# Altium PCB STM_System_Board.PCBDOC (part 9 of 16)
Units mm, origin at the board's own origin, x right, y up, seen from the top; angles counter-clockwise.
Board outline 222.53 x 100.01 mm, 6 copper layers (Top Layer, Int1 (GND), Int2 (Sign), Layer 1, Layer 2, Bottom Layer), stack 1.526 mm thick; 702 components, 774 nets, 3596 pads, 1988 vias.
Unrouted connection lines stored in the file: 1.
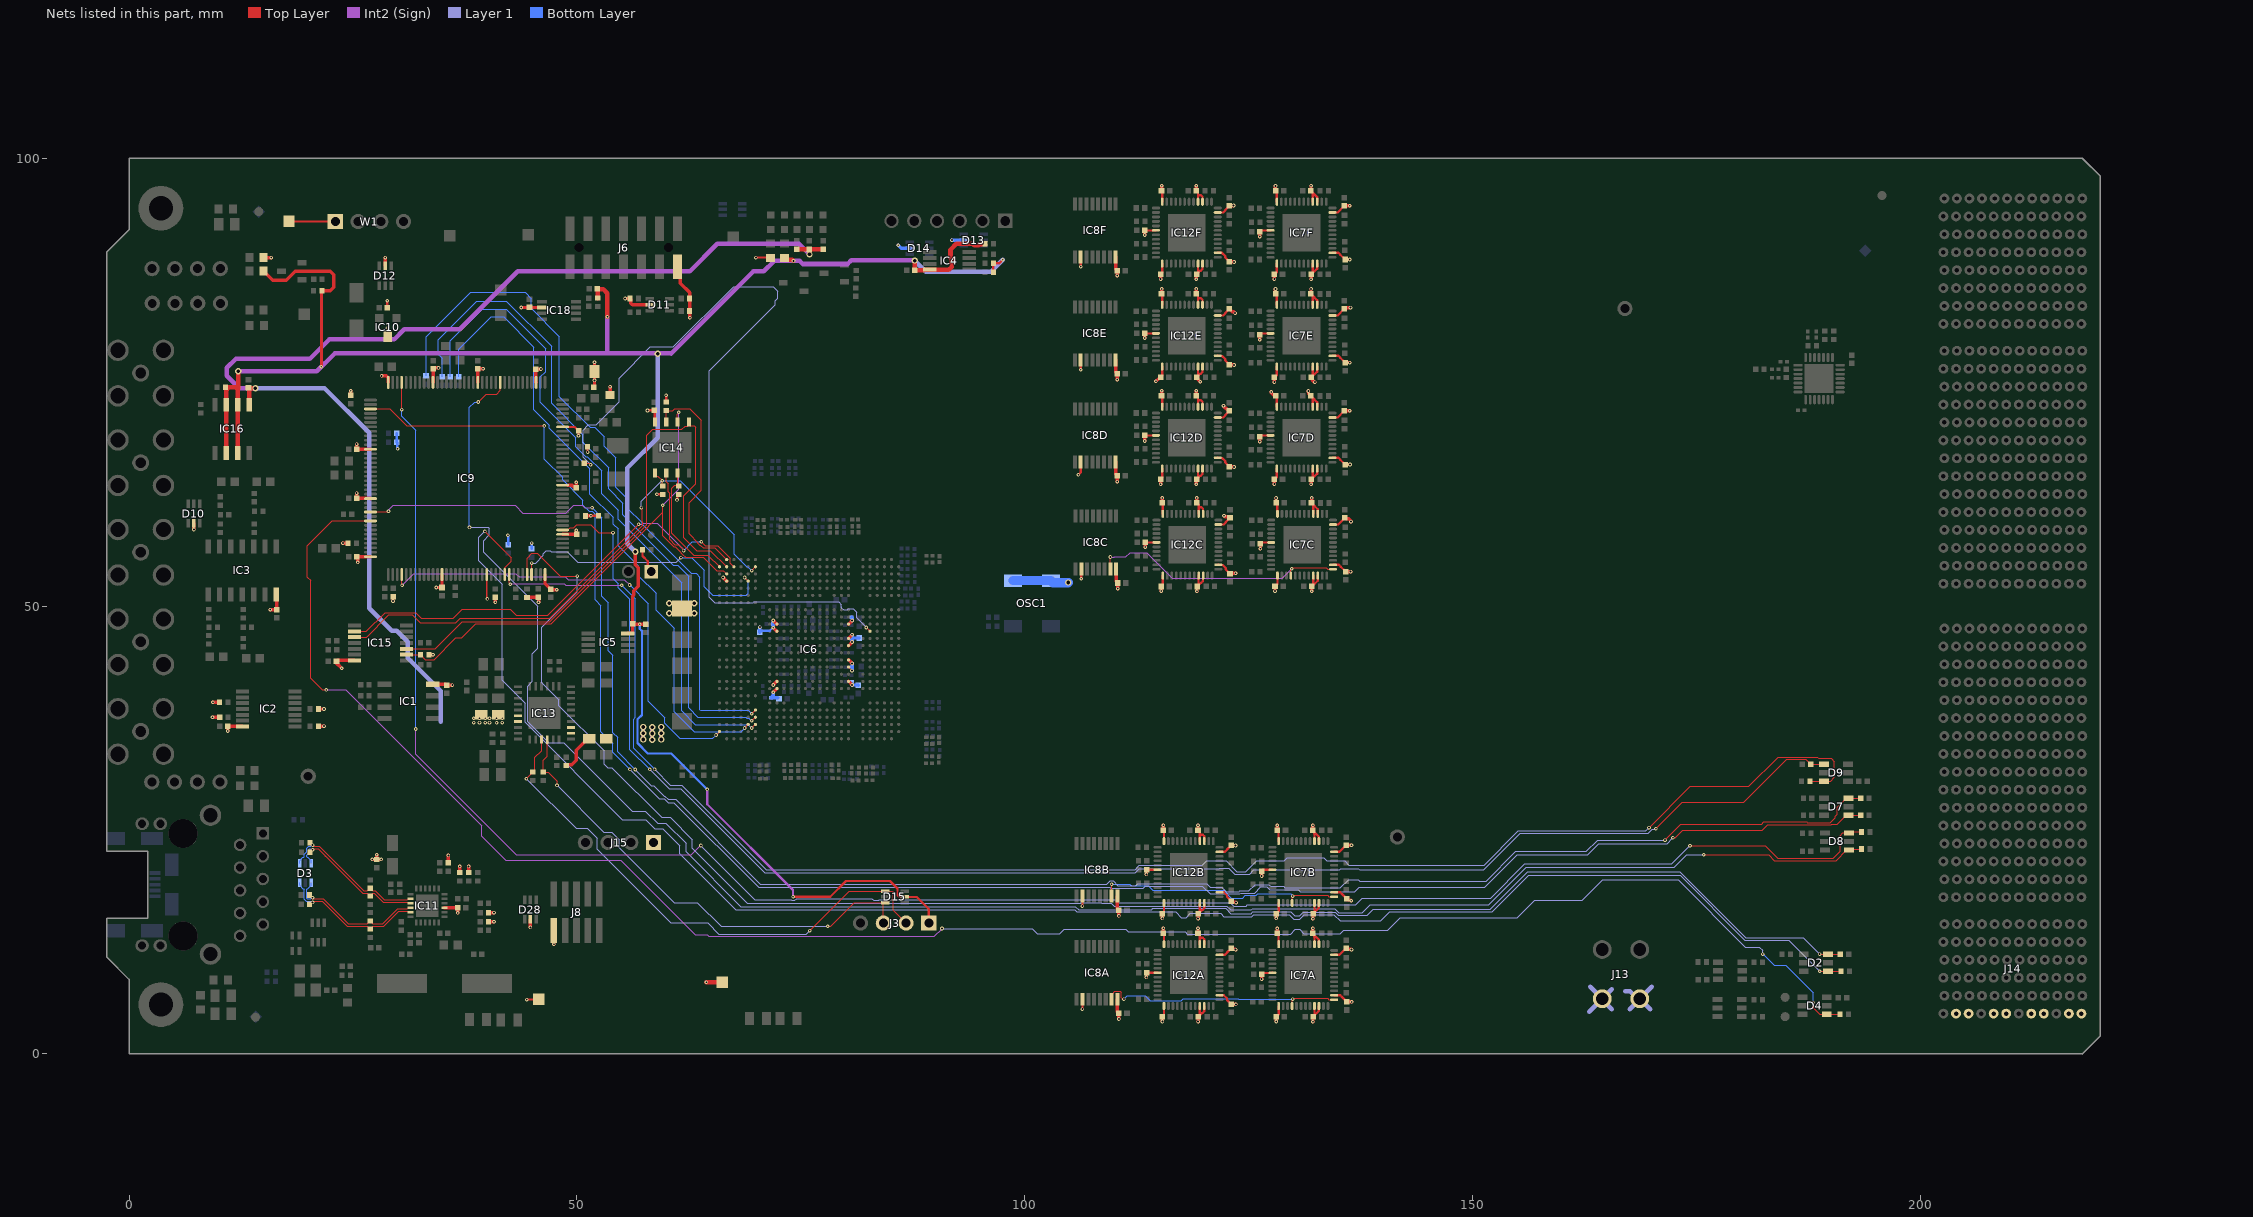
[diagram p12: the nets of this part, all layers, seen from the top]

## Via types
v1: diameter 0.4, hole 0.2, Top Layer to Bottom Layer, tented both sides, 1806 vias
v2: diameter 0.7, hole 0.4, Top Layer to Bottom Layer, tented both sides, 92 vias
v3: diameter 0.7, hole 0.4, Top Layer to Bottom Layer, 90 vias

## Nets (pads, with @x,y where several pads share a name; then routed paths per layer and width w, separated by ;. In a path a pad name is that pad's centre, name@x,y a point inside that pad or via, vN(x,y) a via of type N, cw(c..) or ccw(c..) an arc to the next point about the centre after c; other vN are vias at no path point) (continued)
P3V3: C1.2 C5.2 C6.2 C8A.2 C8B.2 C8C.2 C8D.2 C8E.2 C8F.2 C9A.2 C9B.2 C9C.2 C9D.2 C9E.2 C9F.2 C12A.2 C12B.2 C12C.2 C12D.2 C12E.2 C12F.2 C13A.2 C13B.2 C13C.2 C13D.2 C13E.2 C13F.2 C16A.2 C16B.2 C16C.2 C16D.2 C16E.2 C16F.2 C17A.2 C17B.2 C17C.2 C17D.2 C17E.2 C17F.2 C18A.2 C18B.2 C18C.2 C18D.2 C18E.2 C18F.2 C19A.2 C19B.2 C19C.2 C19D.2 C19E.2 C19F.2 C20A.2 C20B.2 C20C.2 C20D.2 C20E.2 C20F.2 C34.2 C35.1 C36.2 C37.1 C38.1 C41.1 C43.1 C44.2 C45.2 C47.2 C48.2 C49.2 C50.2 C51.2 C53.2 C55.2 C56.2 C57.1 C67.1 C70.1 C71.1 C72.1 C73.1 C74.1 C75.2 C78.2 C84.2 C86.2 C89.1 C135A.2 C135B.2 C135C.2 C135D.2 C135E.2 C135F.2 C136A.2 C136B.2 C136C.2 C136D.2 C136E.2 C136F.2 C137A.2 C137B.2 C137C.2 C137D.2 C137E.2 C137F.2 C138A.2 C138B.2 C138C.2 C138D.2 C138E.2 C138F.2 C139A.2 C139B.2 C139C.2 C139D.2 C139E.2 C139F.2 C140A.2 C140B.2 C140C.2 C140D.2 C140E.2 C140F.2 C143.2 D10.5 D11.5 D12.5 D13.5 D14.5 D28.5 IC1.8 IC2.14 IC3.14 IC6.AE4 IC6.H10 IC6.H12 IC6.H13 IC6.H15 IC6.H16 IC6.H18 IC6.V10 IC6.V11 IC6.V18 IC6.V19 IC7A.2 IC7A.11 IC7A.15 IC7A.16 IC7A.24 IC7A.30 IC7A.37 IC7A.45 IC7A.46 IC7B.2 IC7B.11 IC7B.15 IC7B.16 IC7B.24 IC7B.30 IC7B.37 IC7B.45 IC7B.46 IC7C.2 IC7C.11 IC7C.15 IC7C.16 IC7C.24 IC7C.30 IC7C.37 IC7C.45 IC7C.46 IC7D.2 IC7D.11 IC7D.15 IC7D.16 IC7D.24 IC7D.30 IC7D.37 IC7D.45 IC7D.46 IC7E.2 IC7E.11 IC7E.15 IC7E.16 IC7E.24 IC7E.30 IC7E.37 IC7E.45 IC7E.46 IC7F.2 IC7F.11 IC7F.15 IC7F.16 IC7F.24 IC7F.30 IC7F.37 IC7F.45 IC7F.46 IC8A.10 IC8A.16 IC8B.10 IC8B.16 IC8C.10 IC8C.16 IC8D.10 IC8D.16 IC8E.10 IC8E.16 IC8F.10 IC8F.16 IC9.6 IC9.17 IC9.30 IC9.39 IC9.52 IC9.62 IC9.72 IC9.84 IC9.95 IC9.108 IC9.121 IC9.131 IC9.144 IC10.3 IC11.9 IC12A.2 IC12A.11 IC12A.15 IC12A.16 IC12A.24 IC12A.30 IC12A.37 IC12A.45 IC12A.46 IC12B.2 IC12B.11 IC12B.15 IC12B.16 IC12B.24 IC12B.30 IC12B.37 IC12B.45 IC12B.46 IC12C.2 IC12C.11 IC12C.15 IC12C.16 IC12C.24 IC12C.30 IC12C.37 IC12C.45 IC12C.46 IC12D.2 IC12D.11 IC12D.15 IC12D.16 IC12D.24 IC12D.30 IC12D.37 IC12D.45 IC12D.46 IC12E.2 IC12E.11 IC12E.15 IC12E.16 IC12E.24 IC12E.30 IC12E.37 IC12E.45 IC12E.46 IC12F.2 IC12F.11 IC12F.15 IC12F.16 IC12F.24 IC12F.30 IC12F.37 IC12F.45 IC12F.46 IC13.8 IC13.9 IC14.8 IC15.14 IC18.2 J6.2 J8.1 J15.1 JP2.1 L7.2 L15.1 OSC1.1 OSC1.4 R1.1 R2.1 R11.1 R12.2 R13.1 R16.1 R18.1 R21.1 R31.1 R33.1 R35.2 R42.1 R43.1 R44.1 R59.1 R95.1 R97.2 R98.1 R99.1 R131.1 R132.1 R136.1 R196.1 R206.1 R223.2 R224.2 R225.2 R226.2 R229.2 R234.2 R239.1 R240.1 R241.2 R300.2 TP3.1 TP5.1 W1.1 | length 354.6
  Top Layer w0.127: IC6.H16@80.316,43.184 v1@80.702,42.798
  Top Layer w0.203: IC9.131@39.935,53.521 39.935,50.87 v1(40.005,50.8)
  Top Layer w0.254: TP5.1@17.856,92.939 17.878,92.917 W1.1@23.028,92.917 ; v1(28.829,81.026) 28.829,80.159 IC10.3@28.877,80.111 ; v1(28.829,84.074) 28.836,84.067 28.836,83.297 C67.1@28.842,83.291 ; v1(44.399,6.071) 45.695,6.071 TP3.1@45.72,6.096 ; IC9.30@48.41,69.996 49.754,69.996 50.21,69.54 50.175,69.505 v1(50.175,69) ; R13.1@51.16,67.766 51.171,67.756 51.171,67.193 v1(51.181,67.183) ; v1(51.562,60.071) R2.1@52.413,60.071 ; R229.2@57.315,56.276 57.315,55.588 57.912,54.991 57.912,54.229 JP2.1@58.293,53.848 ; v1(57.875,71.825) 57.9,71.85 C45.2@58.65,71.85 58.674,71.826 58.674,70.568 IC14.8@58.697,70.544 ; v1(58.928,62.484) 58.943,62.469 59.571,62.469 R223.2@59.586,62.454 ; v1(59.944,73.533) 59.956,73.521 59.956,72.773 R224.2@59.967,72.762 ; v1(61.167,61.849) 61.214,61.896 61.214,62.304 R225.2@61.364,62.454 ; v1(69.977,88.9) 71.59,88.9 R196.1@71.628,88.862 ; v1(105.975,64.65) 106.229,64.904 IC8D.10@106.229,66.094 ; v1(106.229,76.385) IC8E.10@106.229,77.479 ; v1(106.229,87.893) IC8F.10@106.229,88.979 ; v1(106.294,53.052) IC8C.10@106.294,54.146 ; v1(106.425,5.012) IC8A.10@106.425,6.106 ; v1(106.425,16.501) IC8B.10@106.425,17.606 ; C17D.2@113.394,69.044 IC12D.30@114.629,69.044 ; C17E.2@113.394,80.429 IC12E.30@114.629,80.429 ; C17F.2@113.394,91.929 IC12F.30@114.629,91.929 ; C17C.2@113.459,57.096 IC12C.30@114.694,57.096 ; C17A.2@113.59,9.056 IC12A.30@114.825,9.056 ; C17B.2@113.59,20.556 IC12B.30@114.825,20.556 ; C135D.2@115.154,64.129 115.32,64.295 115.32,65.336 IC12D.37@115.329,65.344 ; C135E.2@115.154,75.513 115.32,75.68 115.32,76.721 IC12E.37@115.329,76.729 ; C135F.2@115.154,87.013 115.32,87.18 115.32,88.221 IC12F.37@115.329,88.229 ; C135C.2@115.219,52.18 115.385,52.347 115.385,53.388 IC12C.37@115.394,53.396 ; C20D.2@115.256,73.477 115.32,73.413 115.32,72.253 IC12D.24@115.329,72.244 ; C20E.2@115.256,84.862 115.32,84.798 115.32,83.638 IC12E.24@115.329,83.629 ; C20F.2@115.256,96.362 115.32,96.298 115.32,95.138 IC12F.24@115.329,95.129 ; C20C.2@115.321,61.529 115.385,61.465 115.385,60.305 IC12C.24@115.394,60.296 ; C135A.2@115.35,4.141 115.516,4.307 115.516,5.348 IC12A.37@115.525,5.356 ; C135B.2@115.35,15.641 115.516,15.807 115.516,16.848 IC12B.37@115.525,16.856 ; C20A.2@115.452,13.489 115.516,13.425 115.516,12.265 IC12A.24@115.525,12.256 ; C20B.2@115.452,24.989 115.516,24.925 115.516,23.765 IC12B.24@115.525,23.756 ; C19D.2@119.131,73.471 119.329,73.273 119.329,73.061 ; C19E.2@119.131,84.856 119.329,84.658 119.329,84.446 ; C19F.2@119.131,96.356 119.329,96.158 119.329,95.946 ; C18D.2@119.163,64.129 C18D.2@119.32,64.286 ; C18E.2@119.163,75.513 C18E.2@119.32,75.671 ; C18F.2@119.163,87.013 C18F.2@119.32,87.171 ; C19C.2@119.196,61.523 119.394,61.325 119.394,61.113 ; C18C.2@119.228,52.18 C18C.2@119.385,52.338 ; C19A.2@119.327,13.483 119.525,13.285 119.525,13.073 ; C19B.2@119.327,24.983 119.525,24.785 119.525,24.573 ; IC12D.45@119.329,65.344 119.32,65.336 C18D.2@119.32,64.286 ; IC12D.16@119.329,72.244 119.329,73.061 ; IC12E.45@119.329,76.729 119.32,76.721 C18E.2@119.32,75.671 ; IC12E.16@119.329,83.629 119.329,84.446 ; IC12F.45@119.329,88.229 119.32,88.221 C18F.2@119.32,87.171 ; IC12F.16@119.329,95.129 119.329,95.946 ; C18A.2@119.359,4.141 C18A.2@119.516,4.298 ; C18B.2@119.359,15.641 C18B.2@119.516,15.798 ; IC12C.45@119.394,53.396 119.385,53.388 C18C.2@119.385,52.338 ; IC12C.16@119.394,60.296 119.394,61.113 ; IC12A.45@119.525,5.356 119.516,5.348 C18A.2@119.516,4.298 ; IC12A.16@119.525,12.256 119.525,13.073 ; IC12B.45@119.525,16.856 119.516,16.848 C18B.2@119.516,15.798 ; IC12B.16@119.525,23.756 119.525,24.573 ; IC12D.46@119.829,65.344 119.82,65.336 119.82,64.744 119.625,64.549 119.583,64.549 C18D.2@119.32,64.286 ; IC12D.15@119.829,72.244 119.82,72.253 119.82,72.802 119.653,72.969 119.421,72.969 119.329,73.061 ; IC12E.46@119.829,76.729 119.82,76.721 119.82,76.129 119.625,75.934 119.583,75.934 C18E.2@119.32,75.671 ; IC12E.15@119.829,83.629 119.82,83.638 119.82,84.187 119.653,84.354 119.421,84.354 119.329,84.446 ; IC12F.46@119.829,88.229 119.82,88.221 119.82,87.629 119.625,87.434 119.583,87.434 C18F.2@119.32,87.171 ; IC12F.15@119.829,95.129 119.82,95.138 119.82,95.687 119.653,95.854 119.421,95.854 119.329,95.946 ; IC12C.46@119.894,53.396 119.885,53.388 119.885,52.796 119.69,52.601 119.648,52.601 C18C.2@119.385,52.338 ; IC12C.15@119.894,60.296 119.885,60.305 119.885,60.854 119.718,61.021 119.486,61.021 119.394,61.113 ; IC12A.46@120.025,5.356 120.016,5.348 120.016,4.756 119.821,4.561 119.779,4.561 C18A.2@119.516,4.298 ; IC12A.15@120.025,12.256 120.016,12.265 120.016,12.814 119.849,12.981 119.617,12.981 119.525,13.073 ; IC12B.46@120.025,16.856 120.016,16.848 120.016,16.256 119.821,16.061 119.779,16.061 C18B.2@119.516,15.798 ; IC12B.15@120.025,23.756 120.016,23.765 120.016,24.314 119.849,24.481 119.617,24.481 119.525,24.573 ; IC12D.2@121.529,66.544 121.538,66.536 122.013,66.536 122.354,66.194 122.354,66.022 C136D.2@122.832,65.544 ; IC12D.11@121.529,71.044 121.538,71.053 122.134,71.053 122.354,71.273 122.354,71.316 C137D.2@122.832,71.794 ; IC12E.2@121.529,77.929 121.538,77.921 122.013,77.921 122.354,77.579 122.354,77.407 C136E.2@122.832,76.929 ; IC12E.11@121.529,82.429 121.538,82.438 122.134,82.438 122.354,82.658 122.354,82.701 C137E.2@122.832,83.179 ; IC12F.2@121.529,89.429 121.538,89.421 122.013,89.421 122.354,89.079 122.354,88.907 C136F.2@122.832,88.429 ; IC12F.11@121.529,93.929 121.538,93.938 122.134,93.938 122.354,94.158 122.354,94.201 C137F.2@122.832,94.679 ; IC12C.2@121.594,54.596 121.603,54.588 122.078,54.588 122.419,54.246 122.419,54.074 C136C.2@122.897,53.596 ; IC12C.11@121.594,59.096 121.603,59.105 122.199,59.105 122.419,59.325 122.419,59.368 C137C.2@122.897,59.846 ; IC12A.2@121.725,6.556 121.734,6.548 122.209,6.548 122.55,6.206 122.55,6.034 C136A.2@123.028,5.556 ; IC12A.11@121.725,11.056 121.734,11.065 122.33,11.065 122.55,11.285 122.55,11.328 C137A.2@123.028,11.806 ; IC12B.2@121.725,18.056 121.734,18.048 122.209,18.048 122.55,17.706 122.55,17.534 C136B.2@123.028,17.056 ; IC12B.11@121.725,22.556 121.734,22.565 122.33,22.565 122.55,22.785 122.55,22.828 C137B.2@123.028,23.306 ; C16D.2@126.229,68.894 126.37,69.036 127.42,69.036 IC7D.30@127.429,69.044 ; C16E.2@126.229,80.279 126.37,80.421 127.42,80.421 IC7E.30@127.429,80.429 ; C16F.2@126.229,91.779 126.37,91.921 127.42,91.921 IC7F.30@127.429,91.929 ; C16C.2@126.294,56.946 126.435,57.088 127.485,57.088 IC7C.30@127.494,57.096 ; C16A.2@126.425,8.906 126.566,9.048 127.616,9.048 IC7A.30@127.625,9.056 ; C16B.2@126.425,20.406 126.566,20.548 127.616,20.548 IC7B.30@127.625,20.556 ; C140D.2@127.854,64.134 128.129,64.409 IC7D.37@128.129,65.344 ; C140E.2@127.854,75.519 128.129,75.794 IC7E.37@128.129,76.729 ; C140F.2@127.854,87.019 128.129,87.294 IC7F.37@128.129,88.229 ; C140C.2@127.919,52.186 128.194,52.461 IC7C.37@128.194,53.396 ; C9D.2@127.994,73.469 128.12,73.343 128.12,72.253 IC7D.24@128.129,72.244 ; C9E.2@127.994,84.854 128.12,84.728 128.12,83.638 IC7E.24@128.129,83.629 ; C9F.2@127.994,96.354 128.12,96.228 128.12,95.138 IC7F.24@128.129,95.129 ; C140A.2@128.05,4.146 128.325,4.421 IC7A.37@128.325,5.356 ; C140B.2@128.05,15.646 128.325,15.921 IC7B.37@128.325,16.856 ; C9C.2@128.059,61.521 128.185,61.395 128.185,60.305 IC7C.24@128.194,60.296 ; C9A.2@128.19,13.481 128.316,13.355 128.316,12.265 IC7A.24@128.325,12.256 ; C9B.2@128.19,24.981 128.316,24.855 128.316,23.765 IC7B.24@128.325,23.756 ; C12D.2@131.94,73.466 C12D.2@131.927,73.453 C12D.2@132.11,73.27 ; C12E.2@131.94,84.851 C12E.2@131.927,84.838 C12E.2@132.11,84.655 ; v1@131.94,85.392 v1(131.952,85.404) ; C12F.2@131.94,96.351 C12F.2@131.927,96.338 C12F.2@132.11,96.155 ; v1@131.94,96.892 v1(131.952,96.904) ; C13D.2@131.964,64.131 132.12,64.287 132.12,65.336 IC7D.45@132.129,65.344 ; C13F.2@131.964,87.016 132.12,87.172 132.12,88.221 IC7F.45@132.129,88.229 ; C13D.2@131.977,64.134 132.618,64.775 132.62,64.775 132.62,65.336 IC7D.46@132.629,65.344 ; C13E.2@131.977,75.519 132.618,76.16 132.62,76.16 132.62,76.721 IC7E.46@132.629,76.729 ; C13F.2@131.977,87.019 132.618,87.66 132.62,87.66 132.62,88.221 IC7F.46@132.629,88.229 ; C12C.2@132.004,61.517 C12C.2@131.992,61.505 C12C.2@132.175,61.322 ; v1@132.004,62.059 v1(132.017,62.071) ; C13C.2@132.029,52.183 132.185,52.339 132.185,53.388 IC7C.45@132.194,53.396 ; C13C.2@132.042,52.186 132.683,52.827 132.685,52.827 132.685,53.388 IC7C.46@132.694,53.396 ; C13E.2@132.12,75.672 132.12,76.721 IC7E.45@132.129,76.729 ; IC7D.16@132.129,72.244 132.129,72.969 132.166,73.006 132.11,73.061 C12D.2@132.11,73.27 ; IC7E.16@132.129,83.629 132.129,84.354 132.166,84.391 132.11,84.446 C12E.2@132.11,84.655 ; IC7F.16@132.129,95.129 132.129,95.854 132.166,95.891 132.11,95.946 C12F.2@132.11,96.155 ; C12A.2@132.136,13.478 C12A.2@132.123,13.465 C12A.2@132.306,13.282 ; v1@132.136,14.019 v1(132.148,14.031) ; C12B.2@132.136,24.978 C12B.2@132.123,24.965 C12B.2@132.306,24.782 ; v1@132.136,25.519 v1(132.148,25.531) ; C13A.2@132.16,4.143 132.316,4.299 132.316,5.348 IC7A.45@132.325,5.356 ; C13B.2@132.16,15.643 132.316,15.799 132.316,16.848 IC7B.45@132.325,16.856 ; C13A.2@132.173,4.146 132.814,4.787 132.816,4.787 132.816,5.348 IC7A.46@132.825,5.356 ; C13B.2@132.173,15.646 132.814,16.287 132.816,16.287 132.816,16.848 IC7B.46@132.825,16.856 ; IC7C.16@132.194,60.296 132.194,61.021 132.231,61.058 132.175,61.113 C12C.2@132.175,61.322 ; IC7A.16@132.325,12.256 132.325,12.981 132.362,13.018 132.306,13.073 C12A.2@132.306,13.282 ; IC7B.16@132.325,23.756 132.325,24.481 132.362,24.518 132.306,24.573 C12B.2@132.306,24.782 ; IC7D.15@132.629,72.244 132.62,72.253 132.62,72.76 C12D.2@132.11,73.27 ; IC7E.15@132.629,83.629 132.62,83.638 132.62,84.145 C12E.2@132.11,84.655 ; IC7F.15@132.629,95.129 132.62,95.138 132.62,95.645 C12F.2@132.11,96.155 ; IC7C.15@132.694,60.296 132.685,60.305 132.685,60.812 C12C.2@132.175,61.322 ; IC7A.15@132.825,12.256 132.816,12.265 132.816,12.772 C12A.2@132.306,13.282 ; IC7B.15@132.825,23.756 132.816,23.765 132.816,24.272 C12B.2@132.306,24.782 ; IC7D.2@134.329,66.544 135.006,66.544 135.207,66.344 135.207,66.337 C139D.2@135.749,65.794 ; IC7D.11@134.329,71.044 134.338,71.053 134.92,71.053 C138D.2@135.661,71.794 C138D.2@135.725,71.794 ; IC7E.2@134.329,77.929 135.006,77.929 135.207,77.729 135.207,77.722 C139E.2@135.749,77.179 ; IC7E.11@134.329,82.429 134.338,82.438 134.92,82.438 C138E.2@135.661,83.179 C138E.2@135.725,83.179 ; IC7F.2@134.329,89.429 135.006,89.429 135.207,89.229 135.207,89.222 C139F.2@135.749,88.679 ; IC7F.11@134.329,93.929 134.338,93.938 134.92,93.938 C138F.2@135.661,94.679 C138F.2@135.725,94.679 ; IC7C.2@134.394,54.596 135.071,54.596 135.272,54.396 135.272,54.389 C139C.2@135.814,53.846 ; IC7C.11@134.394,59.096 134.403,59.105 134.985,59.105 C138C.2@135.726,59.846 C138C.2@135.79,59.846 ; IC7A.2@134.525,6.556 135.202,6.556 135.403,6.356 135.403,6.349 C139A.2@135.945,5.806 ; IC7A.11@134.525,11.056 134.534,11.065 135.116,11.065 C138A.2@135.857,11.806 C138A.2@135.921,11.806 ; IC7B.2@134.525,18.056 135.202,18.056 135.403,17.856 135.403,17.849 C139B.2@135.945,17.306 ; IC7B.11@134.525,22.556 134.534,22.565 135.116,22.565 C138B.2@135.857,23.306 C138B.2@135.921,23.306
  Top Layer w0.381: v1(7.239,58.54) D10.5@7.239,59.225 ; v1(9.316,37.577) R59.1@10.116,37.577 ; v1(9.36,39.266) v1(9.36,39.266) 10.103,39.267 R21.1@10.104,39.268 ; v1(11.024,36.053) C5.2@11.024,36.601 11.047,36.578 12.617,36.578 IC2.14@12.639,36.556 ; R206.1@15.024,88.9 v1(15.875,88.9) ; v1(15.767,49.599) C6.2@16.51,49.599 16.481,49.628 16.481,51.237 IC3.14@16.451,51.266 ; R11.1@21.139,36.601 v1(21.762,36.601) ; R18.1@21.139,38.506 v1(21.762,38.506) ; v1(23.749,43.053) 23.159,43.643 C44.2@23.159,43.844 23.241,43.926 IC15.14@25.166,43.926 ; v1(23.876,57.023) 23.88,57.019 24.431,57.019 R16.1@24.454,56.996 ; v1(24.74,74.041) 24.743,74.037 24.743,73.542 R300.2@24.765,73.52 ; v1(25.4,62.611) 25.404,62.607 25.404,62.049 C74.1@25.409,62.043 25.433,62.02 26.937,62.02 IC9.95@26.96,61.996 ; v1(25.4,68.072) 25.404,68.068 25.404,67.502 C73.1@25.409,67.496 IC9.84@26.96,67.496 ; v1(25.527,54.864) 25.523,54.868 25.523,55.382 C57.1@25.409,55.496 IC9.108@26.96,55.496 ; v1(27.149,21.71) L7.2@27.66,21.71 ; v1(27.66,22.225) L7.2@27.66,21.71 ; v1(28.157,21.71) L7.2@27.66,21.71 ; v1(28.194,75.692) 28.709,75.692 28.935,75.465 IC9.72@28.935,74.971 ; D12.5@28.6,87.975 v1(28.6,88.9) ; v1(29.464,50.546) 29.468,50.55 29.468,51.024 R33.1@29.479,51.035 ; R226.2@33.489,44.554 v1(33.932,44.554) ; IC1.8@33.9,41.255 35.37,41.255 C1.2@35.45,41.175 v1(36.1,41.175) ; IC9.62@33.935,74.971 C35.1@33.935,76.495 34.018,76.577 34.54,76.577 v1(34.544,76.581) ; v1(34.29,52.07) C70.1@34.933,52.069 ; C70.1@34.933,52.069 34.934,52.07 IC9.121@34.935,53.521 IC9.121@34.935,53.521 ; IC11.9@35.203,16.311 C84.2@36.699,16.311 v1(36.7,15.75) ; R99.1@35.647,21.335 v1(35.647,22.158) ; R98.1@36.909,20.244 v1(36.909,20.937) ; R44.1@37.909,20.244 v1(37.909,20.937) ; IC9.52@38.935,74.971 C37.1@38.935,76.495 39.5,76.495 39.52,76.475 v1(39.525,76.475) ; R43.1@40.139,14.754 v1(40.737,14.754) ; R42.1@40.139,15.781 v1(40.737,15.781) ; R31.1@40.881,50.972 40.89,50.963 40.89,50.423 v1(40.894,50.419) ; v1(43.775,83.325) IC18.2@46.1,83.325 ; R35.2@44.424,50.949 44.439,50.964 45.666,50.964 R97.2@45.681,50.979 45.716,50.944 45.716,50.43 45.711,50.424 v1(45.711,50.419) ; v1(44.8,14.128) D28.5@44.8,15.01 ; IC9.39@45.435,74.971 45.42,74.986 45.42,76.429 C71.1@45.405,76.445 45.411,76.45 45.97,76.45 v1(45.974,76.454) ; IC9.144@46.435,53.521 46.435,52.478 C72.1@47.05,51.864 47.094,51.82 47.748,51.82 v1(47.752,51.816) ; v1(47.425,12.246) J8.1@47.425,13.854 ; IC9.6@48.41,57.996 C43.1@49.985,57.996 49.92,58.062 49.92,58.447 v1(49.916,58.45) ; R234.2@48.808,32.187 48.907,32.286 49.431,32.286 49.911,32.766 49.911,33.899 51.193,35.181 C34.2@51.368,35.181 ; IC9.17@48.945,63.464 49.491,63.464 49.56,63.394 49.582,63.394 49.657,63.319 49.806,63.319 C38.1@49.925,63.2 ; C38.1@49.925,63.405 v1(49.925,63.825) ; R1.1@50.954,60.05 50.971,60.067 v1@51.562,60.067 ; L15.1@51.885,74.425 51.954,74.494 C78.2@51.954,76.2 ; v1(51.962,75.184) 51.958,75.188 51.958,76.196 C78.2@51.954,76.2 ; v1(51.962,77.216) 51.958,77.212 51.958,76.204 C78.2@51.954,76.2 ; R95.1@53.7,73.575 v1(53.7,74.475) ; v1(55.372,84.328) R241.2@55.918,84.328 56.007,84.239 56.007,83.82 56.195,83.632 D11.5@58.129,83.632 ; J6.2@61.213,87.882 61.523,87.573 61.523,86.051 62.573,85.001 R240.1@62.573,84.328 R239.1@62.573,82.931 62.573,82.212 62.611,82.174 v1(62.611,82.169) ; v1(66.315,53.184) IC6.AE4@66.715,52.784 ; v1(71.915,40.384) IC6.V19@72.315,40.784 ; v1(71.915,41.184) IC6.V18@72.315,41.584 ; v1(71.915,47.584) IC6.V11@72.315,47.184 ; v1(71.915,48.384) IC6.V10@72.315,47.984 ; IC6.H18@80.315,41.584 v1(80.715,41.184) ; IC6.H15@80.315,43.984 v1(80.715,43.584) ; IC6.H13@80.315,45.584 v1(80.715,45.984) ; IC6.H12@80.315,46.384 v1(80.715,46.784) ; IC6.H10@80.315,47.984 v1(80.715,48.384) ; IC8D.16@110.129,66.094 110.129,64.694 C8D.2@110.304,64.519 v1(110.304,63.892) ; IC8E.16@110.129,77.479 110.129,76.079 C8E.2@110.304,75.904 v1(110.304,75.277) ; IC8F.16@110.129,88.979 110.129,87.579 C8F.2@110.304,87.404 v1(110.304,86.89) ; IC8C.16@110.194,54.146 110.194,52.746 C8C.2@110.369,52.571 v1(110.369,51.944) ; IC8A.16@110.325,6.106 110.325,4.706 C8A.2@110.5,4.531 v1(110.5,3.904) ; IC8B.16@110.325,17.606 110.325,16.206 C8B.2@110.5,16.031 v1(110.5,15.404) ; v1(113.369,68.425) 113.373,68.428 113.373,69.066 C17D.2@113.381,69.074 ; v1(113.369,79.917) 113.381,79.929 C17E.2@113.381,80.459 ; v1(113.369,91.417) 113.381,91.429 C17F.2@113.381,91.959 ; v1(113.434,56.584) 113.446,56.596 C17C.2@113.446,57.126 ; v1(113.565,8.544) 113.577,8.556 C17A.2@113.577,9.086 ; v1(113.565,20.044) 113.577,20.056 C17B.2@113.577,20.586 ; v1(114.625,75.1) 114.919,75.394 115.034,75.394 C135E.2@115.154,75.513 ; v1(115.154,63.601) C135D.2@115.154,64.129 ; v1(115.154,86.498) C135F.2@115.154,87.013 ; v1(115.219,51.665) C135C.2@115.219,52.18 ; C20D.2@115.256,73.477 115.256,74.007 v1(115.269,74.019) ; C20E.2@115.256,84.862 115.256,85.392 v1(115.269,85.404) ; C20F.2@115.256,96.362 115.256,96.892 v1(115.269,96.904) ; C20C.2@115.321,61.529 115.321,62.059 v1(115.334,62.071) ; v1(115.35,3.625) C135A.2@115.35,4.141 ; v1(115.35,15.125) C135B.2@115.35,15.641 ; C20A.2@115.452,13.489 115.452,14.019 v1(115.465,14.031) ; C20B.2@115.452,24.989 115.452,25.519 v1(115.465,25.531) ; C19D.2@119.131,73.477 v1(119.131,74.019) ; C19E.2@119.131,84.862 v1(119.131,85.404) ; C19F.2@119.131,96.362 v1(119.131,96.904) ; v1(119.138,63.601) 119.15,63.613 C18D.2@119.15,64.143 ; v1(119.138,86.486) 119.15,86.498 C18F.2@119.15,87.028 ; C18E.2@119.15,75.528 119.282,75.396 119.282,75.318 v1(119.575,75.025) ; C19C.2@119.196,61.529 v1(119.196,62.071) ; v1(119.203,51.653) 119.215,51.665 C18C.2@119.215,52.195 ; C19A.2@119.327,13.489 v1(119.327,14.031) ; C19B.2@119.327,24.989 v1(119.327,25.518) ; v1(119.334,3.613) 119.346,3.625 C18A.2@119.346,4.155 ; v1(119.334,15.113) 119.346,15.125 C18B.2@119.346,15.655 ; v1(122.175,72.35) 122.175,72.345 122.204,72.315 122.204,72.253 122.39,72.067 122.458,72.067 122.611,71.914 122.712,71.914 C137D.2@122.832,71.794 ; v1(122.225,60.075) 122.23,60.075 122.341,59.965 122.779,59.965 C137C.2@122.897,59.846 ; C136D.2@122.811,65.532 123.341,65.532 v1(123.354,65.519) ; C136E.2@122.811,76.917 123.341,76.917 v1(123.354,76.904) ; C136F.2@122.811,88.417 123.341,88.417 v1(123.354,88.404) ; C137E.2@122.832,83.179 123.153,82.858 123.308,82.858 123.464,82.702 v1(123.469,82.702) ; C137F.2@122.832,94.679 122.845,94.693 123.289,94.693 v1(123.302,94.706) ; C136C.2@122.876,53.584 122.939,53.646 123.521,53.646 v1(123.525,53.65) ; C136A.2@123.007,5.544 123.537,5.544 v1(123.55,5.531) ; C136B.2@123.007,17.044 123.114,16.937 123.529,16.937 123.566,16.9 v1(123.571,16.9) ; C137A.2@123.028,11.806 123.147,11.687 123.479,11.687 123.52,11.646 v1(123.525,11.646) ; C137B.2@123.028,23.306 123.061,23.273 123.521,23.273 v1(123.525,23.27) ; v1(126.226,68.349) 126.239,68.362 C16D.2@126.239,68.892 ; v1(126.226,79.734) 126.239,79.747 C16E.2@126.239,80.277 ; v1(126.228,91.237) 126.229,91.767 C16F.2@126.239,91.777 ; v1(126.291,56.401) 126.304,56.414 C16C.2@126.304,56.944 ; v1(126.423,8.361) 126.435,8.374 C16A.2@126.435,8.904 ; v1(126.423,19.861) 126.435,19.874 C16B.2@126.435,20.404 ; v1(127.506,73.899) 127.51,73.896 127.51,73.817 127.739,73.588 127.874,73.588 C9D.2@127.994,73.469 ; v1(127.854,63.613) C140D.2@127.854,64.134 ; v1(127.854,74.998) C140E.2@127.854,75.519 ; v1(127.854,86.498) C140F.2@127.854,87.019 ; v1(127.919,51.665) C140C.2@127.919,52.186 ; C9E.2@127.966,84.849 127.966,85.379 v1(127.979,85.392) ; C9F.2@127.966,96.349 127.966,96.879 v1(127.979,96.892) ; C9C.2@128.031,61.516 128.031,62.046 v1(128.044,62.059) ; v1(128.05,3.625) C140A.2@128.05,4.146 ; v1(128.05,15.125) C140B.2@128.05,15.646 ; C9A.2@128.162,13.476 128.162,14.006 v1(128.175,14.019) ; C9B.2@128.163,24.976 128.179,24.993 128.179,25.514 v1(128.175,25.518) ; v1(131.65,74) 131.654,73.996 131.654,73.896 131.655,73.895 131.655,73.75 131.808,73.597 131.808,73.573 131.915,73.466 C12D.2@131.94,73.466 ; C12E.2@131.94,84.851 v1@131.94,85.392 ; C12F.2@131.94,96.351 v1@131.94,96.892 ; v1(131.952,63.588) 131.964,63.601 C13D.2@131.964,64.131 ; v1(131.952,86.473) 131.964,86.486 C13F.2@131.964,87.016 ; C13E.2@131.964,75.516 131.98,75.516 132.096,75.399 132.096,75.233 132.325,75.004 132.371,75.004 v1(132.375,75) ; C12C.2@132.004,61.517 v1@132.004,62.059 ; v1(132.017,51.64) 132.029,51.653 C13C.2@132.029,52.183 ; C12A.2@132.136,13.478 v1@132.136,14.019 ; C12B.2@132.136,24.978 v1@132.136,25.519 ; v1(132.148,3.6) 132.16,3.613 C13A.2@132.16,4.143 ; v1(132.148,15.1) 132.16,15.113 C13B.2@132.16,15.643 ; C138D.2@135.725,71.794 v1(136.267,71.794) ; C138E.2@135.725,83.179 135.725,83.243 135.78,83.299 136.329,83.299 136.342,83.312 v1(136.347,83.312) ; C138F.2@135.725,94.679 v1(136.267,94.679) ; C139D.2@135.749,65.794 v1(136.291,65.794) ; C139E.2@135.749,77.179 v1(136.257,77.179) ; C139F.2@135.749,88.679 v1(136.257,88.679) ; C138C.2@135.79,59.846 135.79,59.783 135.845,59.727 136.167,59.727 136.396,59.498 136.396,59.429 v1(136.4,59.425) ; C139C.2@135.814,53.846 v1(136.356,53.846) ; C138A.2@135.921,11.806 135.921,11.743 135.977,11.687 136.418,11.687 136.458,11.646 v1(136.463,11.646) ; C138B.2@135.921,23.306 v1(136.463,23.306) ; C139A.2@135.945,5.806 v1(136.488,5.806) ; C139B.2@135.945,17.306 136.064,17.187 136.351,17.187 136.434,17.104 v1(136.439,17.104)
  Int2 (Sign) w0.381: v2(57.4,35.1) v2(57.4,35.8) v2(57.4,36.5) ; v2(58.4,35.075) v2(58.4,35.775) v2(58.4,36.475) ; v2(59.4,35.1) v2(59.4,35.8) v2(59.4,36.5)
  Layer 1 w0.381: v2(57.4,35.1) v2(57.4,35.8) v2(57.4,36.5) ; v2(58.4,35.075) v2(58.4,35.775) v2(58.4,36.475) ; v2(59.4,35.1) v2(59.4,35.8) v2(59.4,36.5)
  Bottom Layer w0.254: R131.1@29.894,69.288 R132.1@29.894,68.288 29.933,68.249 29.933,67.603 v1(29.972,67.564) ; v1(42.291,57.912) 42.321,57.882 42.321,56.876 R12.2@42.351,56.846 ; R136.1@44.924,56.389 44.941,56.406 44.941,57.006 v1(44.958,57.023) ; C75.2@70.425,47.234 71.525,47.234 71.875,47.584 v1(71.915,47.584)
  Bottom Layer w0.381: v2(57.4,35.1) v2(57.4,35.8) v2(57.4,36.5) ; v2(58.4,35.075) v2(58.4,35.775) v2(58.4,36.475) ; v2(59.4,35.1) v2(59.4,35.8) v2(59.4,36.5) ; C75.2@70.425,47.075 70.425,47.234 v1(70.425,47.65) ; v1(71.915,40.384) 71.915,40.015 71.71,39.81 71.71,39.785 71.7,39.775 C48.2@72.425,39.775 ; v1(71.915,47.584) v1(71.915,48.384) ; C50.2@80.651,46.371 80.676,46.371 C50.2@80.715,46.409 ; C49.2@80.659,48.748 80.684,48.748 80.694,48.739 80.694,48.714 80.711,48.696 80.711,48.388 v1(80.715,48.384) ; v1@80.691,41.184 v1@80.711,41.184 ; v1(80.703,42.798) 80.703,42.804 80.712,42.813 80.712,43.581 v1(80.715,43.584) ; C56.2@80.711,41.339 80.711,41.188 v1(80.715,41.184) 80.719,41.18 81.369,41.18 C53.2@81.415,41.134 ; v1(80.715,45.984) C50.2@80.715,46.409 ; v1(80.715,46.784) C50.2@80.715,46.409 ; C47.2@81.515,46.434 80.74,46.434 C50.2@80.715,46.409 ; v1(85.875,90.275) 86.2,89.95 D14.5@87.125,89.95 ; v1(91.85,90.85) D13.5@93.2,90.85
  Bottom Layer w1.016: OSC1.4@98.693,52.842 OSC1.1@102.893,52.842 103.138,52.597 104.822,52.597 v2(104.85,52.625)
  other v2: 60.3,49.2 63.1,49.2 60.3,50.3 63.1,50.3
P3V3_MP: C40.2 C42.2 C141.2 D15.5 IC4.8 IC5.8 IC16.2 IC16.3 IC16.6 IC16.7 J3.1 R194.2 R209.2 R215.2 R216.2 R217.1 R219.1 R236.1 R237.2 R282.2 | length 248
  Top Layer w0.254: v1(74.125,17.55) 78.275,17.55 80.025,19.3 84.95,19.3 85.775,18.475 85.775,17.75 85.947,17.578 86.547,17.578 D15.5@86.6,17.525 87.925,17.525 89.281,16.169 J3.1@89.281,14.605 ; R215.2@96.482,87.249 R216.2@96.482,88.265 97.155,88.265 v1(97.536,88.646)
  Top Layer w0.381: R209.2@15.024,87.376 15.024,87.326 15.284,87.066 15.334,87.066 16.04,86.36 17.526,86.36 18.542,87.376 22.479,87.376 22.86,86.995 22.86,85.598 22.472,85.21 R194.2@21.537,85.21 21.486,85.159 21.486,76.731 v1(21.463,76.708) ; IC5.8@55.667,46.949 56.168,46.949 56.203,46.984 C40.2@56.203,48.006 ; v2(56.525,56.05) 56.525,54.586 56.825,54.286 56.825,52.214 56.325,51.714 56.325,51.227 56.203,51.105 C40.2@56.203,48.006 ; R219.1@57.658,47.968 57.639,47.987 56.222,47.987 C40.2@56.203,48.006
  Top Layer w0.508: R237.2@10.757,74.422 11.887,74.422 12.129,74.18 ; IC16.6@10.859,67.065 IC16.3@10.859,72.465 10.859,74.105 R237.2@10.966,74.212 ; IC16.7@12.129,67.065 IC16.2@12.129,72.465 12.129,74.18 ; v2(12.192,76.2) 12.192,74.243 12.129,74.18 ; C141.2@52.25,85.4 C141.2@52.266,85.384 ; R282.2@52.3,84.37 52.3,85.35 C141.2@52.266,85.384 ; v1(53.4,82.3) 53.4,84.9 52.916,85.384 C141.2@52.266,85.384 ; R236.1@73.152,88.862 73.348,88.666 74.021,88.666 v1(74.168,88.519) ; v2(87.694,88.561) 87.696,88.558 87.696,87.506 C42.2@87.699,87.503 88.771,87.503 88.783,87.515 IC4.8@89.338,87.515 ; IC4.8@89.367,87.544 91.519,87.544 91.817,87.842 91.817,88.777 91.694,88.9 91.694,89.789 92.329,90.424 94.179,90.424 94.334,90.269 94.842,90.269 94.941,90.368 95.506,90.368 95.542,90.404 R217.1@95.542,90.424
  Int2 (Sign) w0.254: v1(64.55,29.525) 64.55,27.863 74.125,18.288 v1(74.125,17.55)
  Int2 (Sign) w0.508: v2(12.192,76.2) 20.955,76.2 22.987,78.232 53.398,78.232 ; v1(53.4,82.3) 53.4,78.234 53.398,78.232 ; v2(87.694,88.561) 87.642,88.561 87.585,88.617 80.637,88.617 80.2,88.18 75.216,88.18 74.877,88.519 72.023,88.519 70.859,87.355 69.702,87.355 60.536,78.189 60.493,78.232 53.398,78.232
  Layer 1 w0.508: v2(56.525,56.05) 55.626,56.949 55.626,65.405 59.025,68.804 v2@59.025,78.232 ; v2(87.694,88.561) 88.93,87.325 96.215,87.325 v1(97.536,88.646)
  Bottom Layer w0.254: v1(57,47.975) 57,47.475 57.25,47.225 57.25,37.85 56.75,37.35 56.75,34.7 57.9,33.55 60.525,33.55 v1(64.55,29.525)
  other v2: 59.025,78.175
P5V0_MP: J14.B1
P12V0: C22.2 C26.2 C46.2 IC13.28 IC13.29 IC16.1 J13.3 J13.4 J14.A1 J14.D1 J14.E1 J14.G1 J14.H1 J14.J1 J14.K1 R195.2 R207.2 R208.2 TP4.1 | length 148.7
  Top Layer w0.508: C46.2@13.335,74.353 C46.2@13.391,74.297 ; IC16.1@13.399,72.465 13.399,74.289 C46.2@13.391,74.297 ; v2@14.097,74.295 14.095,74.297 C46.2@13.391,74.297 ; C26.2@39.298,37.891 C26.2@39.303,37.886 ; v1(64.447,7.997) TP4.1@66.215,7.997 ; R207.2@74.549,89.827 R208.2@75.946,89.827 ; v2(75.962,89.25) 75.962,89.331 75.954,89.339 75.954,89.819 R208.2@75.946,89.827 ; R195.2@77.47,89.827 R208.2@75.946,89.827
  Int2 (Sign) w0.508: v2(14.104,74.322) 12.292,74.322 10.922,75.692 10.922,76.581 11.938,77.597 20.193,77.597 22.352,79.756 29.591,79.756 30.734,80.899 36.899,80.899 43.376,87.376 62.611,87.376 65.659,90.424 74.788,90.424 v2(75.962,89.25)
  Layer 1 w0.508: v2(14.104,74.322) 21.817,74.322 26.8,69.339 26.8,49.772 29.325,47.247 29.893,47.247 31.115,46.025 31.115,44.196 34.798,40.513 34.798,37.059 ; 163,4.719 J13.3@164.44,6.159 ; 163.098,7.5 J13.3@164.44,6.159 ; 165.5,5 164.44,6.06 J13.3@164.44,6.159 ; 165.5,7.24 164.44,6.18 J13.3@164.44,6.159 ; 167,7 167.546,7 168.387,6.159 J13.4@168.64,6.159 ; 167.5,5 168.64,6.14 J13.4@168.64,6.159 ; 169.798,5 J13.4@168.64,6.159 ; 169.981,7.5 J13.4@168.64,6.159
  other v1: 38.481,36.987 39.116,36.987 39.751,36.987 40.24,36.987 41.03,36.977 41.656,36.987 38.481,37.465 39.116,37.465 39.751,37.465 40.24,37.465 41.03,37.465 41.656,37.465
P_IO0: D9.3 IC9.136 R265.1 | length 184.1
  Top Layer w0.127: IC9.136@42.435,53.521 42.435,52.626 42.545,52.516 v1(42.545,52.442) ; v1(169.672,25.273) 174.274,29.875 180.825,29.875 184.097,33.147 188.468,33.147 188.595,33.02 189.992,33.02 190.373,32.639 190.373,30.861 189.943,30.431 D9.3@189.199,30.431 R265.1@187.623,30.431
  Int2 (Sign) w0.127: v1(42.545,52.442) 42.563,52.46 48.599,52.46 48.731,52.329 54.395,52.329 54.4,52.324 v1(54.991,52.324)
  Layer 1 w0.127: v1@58.547,31.75 58.651,31.75 v1(58.665,31.764) 60.418,30.012 61.682,30.012 71.12,20.574 112.296,20.574 112.779,21.057 119.812,21.057 120.32,21.565 122.46,21.565 123.675,20.35 124.65,20.35 125.89,21.59 128.956,21.59 129.159,21.793 129.171,21.793 129.259,21.881 133.338,21.881 133.68,21.539 135.687,21.539 136.144,21.082 151.257,21.082 155.067,24.892 169.291,24.892 v1(169.672,25.273)
  Bottom Layer w0.127: v1(54.991,52.324) 56.515,50.8 56.515,37.564 56.325,37.374 56.325,34.104 v1(58.665,31.764)
P_IO1: D8.4 IC9.140 R266.1 | length 185.7
  Top Layer w0.127: IC9.140@44.435,53.521 44.435,55.357 44.958,55.88 45.593,55.88 48.133,53.34 v1(50.038,53.34) ; v1(175.768,22.225) 183.007,22.225 183.667,21.565 190.543,21.565 191.748,22.77 D8.4@191.998,22.77 192.104,22.876 R266.1@193.385,22.876
  Layer 1 w0.127: v1(50.038,53.34) 50.038,51.613 46.05,47.625 46.05,41.46 47.985,39.525 47.985,38.883 53.046,33.822 53.046,32.321 53.421,31.946 53.904,31.946 59.438,26.412 60.387,26.412 62.887,23.912 62.887,22.963 69,16.85 106.222,16.85 106.263,16.891 108.537,16.891 108.578,16.85 109.642,16.85 109.982,16.51 122.53,16.51 122.965,16.075 125.295,16.075 125.437,16.217 134.592,16.217 135.062,15.748 137.668,15.748 138.557,16.637 151.765,16.637 155.956,20.828 172.466,20.828 173.863,22.225 v1(175.768,22.225)
P_IO2: D8.6 IC9.69 R267.1 | length 217.1
  Top Layer w0.127: v1(30.435,71.927) IC9.69@30.435,74.971 ; v1(174.244,23.241) 182.626,23.241 184.023,21.844 187.206,21.844 187.231,21.819 189.945,21.819 189.97,21.844 190.246,21.844 191.008,22.606 191.008,24.384 191.294,24.67 D8.6@191.998,24.67 192.104,24.776 R267.1@193.181,24.776
  Int2 (Sign) w0.127: v1(32.013,36.271) 32.013,33.462 43.225,22.25 62.738,22.25 63.643,23.155 63.645,23.155 63.756,23.266 v1(63.83,23.266)
  Layer 1 w0.127: v1(63.83,23.266) 69.872,17.225 73.898,17.225 73.988,17.134 74.3,17.134 74.516,17.35 82.925,17.35 83.141,17.134 83.662,17.134 83.752,17.225 110.131,17.225 110.465,16.891 122.911,16.891 123.292,16.51 124.714,16.51 124.841,16.637 136.906,16.637 137.668,17.399 151.994,17.399 155.804,21.209 172.212,21.209 v1(174.244,23.241)
  Bottom Layer w0.127: v1(30.435,71.927) 30.435,71.165 31.985,69.615 v1@31.985,36.271
P_PRES0: D7.1 IC9.75 R268.1 | length 210.1
  Top Layer w0.127: IC9.75@26.96,71.996 29.096,71.996 30.988,70.104 v1(46.355,70.104) ; v1(172.339,24.13) 172.355,24.146 172.621,24.146 173.425,24.95 182.303,24.95 182.931,25.578 190.004,25.578 190.081,25.654 190.693,25.654 191.669,26.63 D7.1@191.919,26.63 R268.1@193.299,26.63
  Layer 1 w0.127: v1(55.912,31.763) 59.183,28.491 59.758,28.491 60.182,28.067 60.815,28.067 70.296,18.586 109.472,18.586 109.569,18.488 113.205,18.488 113.448,18.731 119.826,18.731 120.679,17.878 124.01,17.878 124.083,17.951 125.632,17.951 126.34,18.659 126.975,18.659 127.32,18.313 130.531,18.313 130.734,18.11 136.83,18.11 137.312,18.593 151.308,18.593 154.94,22.225 162.814,22.225 164.075,23.486 171.695,23.486 v1(172.339,24.13)
  Bottom Layer w0.127: v1(46.355,70.104) 46.355,66.395 48.387,64.363 48.387,64.091 50.664,61.814 50.664,61.265 51.349,60.579 51.689,60.579 52.05,60.218 52.05,50.675 52.675,50.05 52.675,35.975 53.975,34.675 53.975,33.699 v1(55.912,31.763)
P_PRES1: D7.3 IC9.98 R269.1 | length 205.4
  Top Layer w0.127: IC9.98@26.96,60.496 26.993,60.529 28.916,60.529 v1(28.965,60.579) ; v1(171.45,23.876) 173.224,25.65 182.241,25.65 182.499,25.908 187.262,25.908 187.338,25.832 189.899,25.832 190.431,26.364 190.431,26.522 190.678,26.768 190.678,27.539 191.669,28.53 D7.3@191.919,28.53 R269.1@193.299,28.53
  Int2 (Sign) w0.127: v1(28.965,60.579) 28.95,60.595 28.95,60.7 29.473,61.223 43.1,61.223 43.973,60.35 48.775,60.35 49.649,61.223 50.581,61.223 50.844,60.96 51.68,60.96 v1(51.689,60.969)
  Layer 1 w0.127: v1(56.515,31.75) 58.301,29.964 58.577,29.964 59.756,28.785 59.823,28.785 60.204,28.404 61.016,28.404 70.454,18.967 109.155,18.967 109.513,19.325 109.837,19.325 110.376,18.787 112.374,18.787 112.573,18.985 120.32,18.985 120.687,18.618 121.996,18.618 122.482,18.132 123.905,18.132 123.977,18.205 125.012,18.205 125.72,18.913 127.239,18.913 127.457,18.694 128.88,18.694 129.007,18.567 135.23,18.567 136.127,19.465 137.217,19.465 137.403,19.279 151.486,19.279 154.813,22.606 162.687,22.606 163.948,23.867 171.441,23.867 v1(171.45,23.876)
  Bottom Layer w0.127: v1(51.689,60.969) 51.689,60.96 52.775,59.874 52.775,51.075 53.475,50.375 53.475,45.025 54,44.5 54,35.85 54.525,35.325 54.525,33.74 v1(56.515,31.75)
P_RST: D9.1 IC9.7 R264.1 | length 176.4
  Top Layer w0.127: IC9.7@48.41,58.496 48.985,58.496 49.231,58.742 49.657,58.742 49.97,59.055 51.562,59.055 52.451,58.166 54,58.166 v1(54.026,58.191) ; v1(170.434,25.146) 173.388,28.1 180.246,28.1 185.039,32.893 187.177,32.893 187.719,32.351 R264.1@187.719,32.331 D9.1@189.199,32.331
  Layer 1 w0.127: v1(58.117,31.76) 60.286,29.591 61.595,29.591 70.971,20.215 112.296,20.215 112.778,20.697 120.659,20.697 120.693,20.663 121.697,20.663 121.745,20.711 122.764,20.711 123.4,20.075 125.101,20.075 125.575,20.549 135.135,20.549 135.279,20.692 137.238,20.692 137.382,20.549 151.232,20.549 155.321,24.638 169.589,24.638 170.045,25.094 170.382,25.094 v1(170.434,25.146)
  Bottom Layer w0.127: v1(54.026,58.191) 54.026,53.035 54.601,52.46 54.601,52.162 54.619,52.143 54.619,52.019 55.9,50.739 55.9,33.977 v1(58.117,31.76)
PHY_RD_N: D3.1 IC11.22 R40.2 R222.1 | length 16.4
  Top Layer w0.095: R222.1@20.155,17.744 20.397,17.502 20.397,17.395 20.459,17.333 21.682,17.333 24.49,14.525 26.59,14.525 26.646,14.58 26.646,14.598 26.889,14.841 R40.2@26.909,14.841 26.929,14.841 27.171,14.598 27.171,14.58 27.227,14.525 28.324,14.525 29.993,16.194 31.081,16.194 31.198,16.311 IC11.22@31.403,16.311
  Bottom Layer w0.095: D3.1@20.335,19.095 20.335,18.82 19.961,18.446 19.874,18.446 19.818,18.39 19.818,17.451 19.818,17.372 19.874,17.316 20.281,17.316 20.411,17.447 v1(20.489,17.447)
PHY_RD_P: D3.3 IC11.23 R41.2 R221.1 | length 16.8
  Top Layer w0.095: R221.1@20.155,16.691 20.397,16.933 20.397,17.011 20.453,17.066 21.571,17.066 24.379,14.258 26.59,14.258 26.646,14.202 26.646,14.184 26.889,13.942 R41.2@26.909,13.942 26.929,13.942 27.171,14.184 27.171,14.202 27.227,14.258 28.434,14.258 30.104,15.928 31.081,15.928 31.198,15.811 IC11.23@31.403,15.811
  Bottom Layer w0.095: D3.3@19.035,19.095 19.035,18.82 19.409,18.446 19.496,18.446 19.552,18.39 19.552,17.561 19.552,17.262 19.764,17.05 20.281,17.05 20.411,16.92 v1(20.489,16.92)
PHY_TD_N: D3.4 IC11.20 R37.1 R220.1 | length 17
  Top Layer w0.095: R220.1@20.187,23.556 20.43,23.313 20.43,23.232 20.485,23.177 21.228,23.177 22.11,22.295 22.121,22.295 26.224,18.192 26.595,18.192 26.889,18.486 R37.1@26.909,18.486 26.929,18.486 27.223,18.192 27.472,18.192 28.469,17.194 31.081,17.194 31.198,17.311 IC11.20@31.403,17.311
  Bottom Layer w0.095: D3.4@19.035,21.295 19.035,21.57 19.409,21.945 19.496,21.945 19.552,22.001 19.552,22.299 19.824,22.571 19.824,22.969 20.036,23.181 20.281,23.181 20.411,23.311 v1(20.489,23.311)
PHY_TD_P: D3.6 IC11.21 R36.1 R199.1 | length 16.6
  Top Layer w0.095: R199.1@20.187,22.531 20.43,22.773 20.43,22.854 20.485,22.91 21.118,22.91 21.922,22.106 21.922,22.096 21.937,22.08 21.958,22.08 26.114,17.925 26.595,17.925 26.889,17.631 R36.1@26.909,17.631 26.929,17.631 27.223,17.925 27.361,17.925 28.35,16.936 28.359,16.928 31.081,16.928 31.198,16.811 IC11.21@31.403,16.811
  Bottom Layer w0.095: D3.6@20.335,21.295 20.335,21.57 19.961,21.945 19.874,21.945 19.818,22.001 19.818,22.188 20.091,22.46 20.091,22.858 20.146,22.914 20.281,22.914 20.411,22.784 v1(20.489,22.784)
PROGRAM_N: IC6.AB4 IC9.141 | length 32.3
  Top Layer w0.127: IC9.141@44.935,53.521 44.948,53.534 44.948,54.783 v1(44.961,54.796) ; v1(68.715,53.184) IC6.AB4@69.115,52.784
  Layer 1 w0.127: v1(44.961,54.796) 44.967,54.79 45.387,54.79 46.256,55.659 46.256,55.852 46.57,56.166 47.032,56.166 47.113,56.085 48.931,56.085 50.116,54.9 61.098,54.9 v1(61.6,55.402)
  Bottom Layer w0.127: v1(61.6,55.402) 62.798,55.402 64.2,54 64.2,52.132 65.139,51.194 68.877,51.194 69.105,51.422 69.105,52.794 v1(68.715,53.184)
PS_ON_N: D4.4 IC9.100 R126.1 | length 217.8
  Top Layer w0.127: v1(22.022,40.64) 21.59,40.64 20.269,41.961 20.269,52.883 19.92,53.232 19.92,56.75 22.666,59.496 IC9.100@26.96,59.496 ; v1(188,5.7) 188,5.15 188.732,4.418 D4.4@189.511,4.418 R126.1@190.98,4.418
  Int2 (Sign) w0.127: v1(22.022,40.64) 24.185,40.64 39.375,25.45 39.375,24.3 42.06,21.615 54.89,21.615 63.221,13.284 64.567,13.284 64.726,13.125 89.875,13.125 v1(90.75,14)
  Layer 1 w0.127: v1(90.75,14) 100.833,14 101.397,13.437 103.911,13.437 104.369,13.894 111.252,13.894 111.519,13.627 117.88,13.627 118.131,13.376 129.683,13.376 130.2,13.894 130.683,13.894 131.14,13.437 135.23,13.437 135.611,13.818 140.513,13.818 141.91,15.215 154.965,15.215 156.921,17.17 162.23,17.17 164.49,19.431 172.93,19.431 180.423,11.938 181.991,11.938 182.372,11.557 v1(182.372,11.141)
  Bottom Layer w0.127: v1(182.372,11.141) 182.407,11.141 183.642,9.906 184.912,9.906 188,6.818 v1(188,5.7)
PWR_FAIL_N: D2.4 IC9.135 R137.1 | length 194.2
  Top Layer w0.127: v1(39.725,58.325) 42.672,55.378 42.672,54.991 41.935,54.254 IC9.135@41.935,53.521 ; v1(188.717,9.241) D2.4@189.64,9.241 R137.1@191.107,9.241
  Layer 1 w0.127: v1(39.725,58.325) 39.05,57.65 39.05,55.05 41.66,52.44 41.66,41.741 44.225,39.175 44.225,37 55.075,26.15 57.675,26.15 58.7,25.125 59.6,25.125 61.5,23.225 61.5,22.325 67.725,16.1 105.541,16.1 105.791,15.85 116.815,15.85 117.434,15.231 117.999,15.231 118.466,15.697 121.851,15.697 122.223,15.325 125.332,15.325 125.532,15.525 129.502,15.525 129.99,15.037 130.658,15.037 131.166,15.545 134.502,15.545 135.188,14.859 139.725,14.859 140.741,15.875 152.171,15.875 156.235,19.939 173.141,19.939 180.38,12.7 185.258,12.7 v1(188.717,9.241)
PWR_SCL: D15.3 IC13.4 J3.3 R211.1 | length 53.2
  Top Layer w0.127: IC13.4@46.684,35.075 46.684,33.222 46.228,32.766 R211.1@46.228,31.458 46.767,31.458 47.775,30.45 v1(47.775,29.975) ; v1(78,14.25) 78.35,14.25 80.975,16.875 84.337,16.875 84.201,16.738 J3.3@84.201,14.605
  Layer 1 w0.127: v1(47.775,29.975) 53.013,24.737 53.888,24.737 54.725,23.9 54.725,23.025 60.85,16.9 63.45,16.9 66.1,14.25 v1(78,14.25)
PWR_SDA: D15.1 IC13.3 J3.2 R210.1 | length 60.1
  Top Layer w0.127: v1(44.352,30.725) 44.839,31.211 44.839,31.231 45.065,31.458 R210.1@45.085,31.458 45.3,31.673 45.3,33.108 46.047,33.855 IC13.3@46.047,35.112 ; v1(75.975,13.775) 80.375,18.175 D15.1@84.4,18.175 85.225,18.175 85.3,18.1 85.3,16.046 J3.2@86.741,14.605
  Layer 1 w0.127: v1(44.352,30.725) 49.901,25.176 51.124,25.176 52.25,24.05 52.25,22.827 60.447,14.63 64.595,14.63 65.85,13.375 75.575,13.375 v1(75.975,13.775)
PWRBTN_N: D2.6 IC9.47 R125.1 | length 208
  Top Layer w0.127: v1(38.989,72.771) 39.878,73.66 41.021,73.66 41.435,74.074 IC9.47@41.435,74.971 ; v1(188.714,11.141) D2.6@189.64,11.141 R125.1@191.02,11.141
  Layer 1 w0.127: v1(38,58.775) 40.075,58.775 40.225,58.625 40.225,57.95 39.575,57.3 39.575,56.002 45.623,49.954 45.623,45.304 45.014,44.695 45.014,41.576 44.479,41.041 44.479,39.281 ; 44.479,39.28 44.479,37.105 46.829,34.755 48.513,34.755 56.15,27.118 57.632,27.118 59,25.75 59.925,25.75 62.175,23.5 62.175,22.575 68.3,16.45 105.648,16.45 105.988,16.11 114.135,16.11 114.265,16.24 122.418,16.24 122.984,15.675 125.254,15.675 125.429,15.85 129.692,15.85 130.106,15.436 130.698,15.436 131.06,15.799 134.652,15.799 134.956,15.494 138.201,15.494 138.862,16.154 151.943,16.154 156.108,20.32 173.119,20.32 180.485,12.954 186.901,12.954 v1(188.714,11.141)
  Bottom Layer w0.127: v1(38,58.775) 38,72.2 38.571,72.771 v1(38.989,72.771)
QSPI_CFG_CEN: IC6.AA2 IC14.1 IC15.10 R223.1 | length 62
  Top Layer w0.127: IC15.10@25.166,46.526 26.511,46.526 29.007,49.022 31.623,49.022 32.512,48.133 36.449,48.133 36.957,48.641 46.949,48.641 57.328,59.02 57.328,59.344 57.277,59.395 57.277,60.902 v1(57.188,60.991) ; IC14.1@58.697,64.844 58.697,64.665 58.859,64.503 59.038,64.503 59.525,64.016 59.525,63.455 R223.1@59.586,63.394 ; v1(69.5,53.95) 69.5,53.96 69.915,54.374 IC6.AA2@69.915,54.384
  Layer 1 w0.127: v1(57.188,60.991) 57.188,61.686 59.477,63.975 v1(59.525,63.975)
  Bottom Layer w0.127: v1(59.525,63.975) 61.55,63.975 67.55,57.975 67.55,55.775 68.951,54.374 69.076,54.374 v1(69.5,53.95)
QSPI_CFG_IO2: IC6.AF2 IC14.3 R225.1 | length 14.2
  Top Layer w0.127: IC14.3@61.237,64.844 61.237,63.521 R225.1@61.301,63.457 ; R225.1@61.364,63.394 R225.1@61.301,63.457 ; IC6.AF2@65.915,54.384 64.616,55.683 63.037,55.683 60.602,58.118 60.602,63.152 60.907,63.457 R225.1@61.301,63.457
QSPI_CFG_IO3: IC6.AE1 IC14.7 R224.1 | length 24.5
  Top Layer w0.127: IC14.7@59.967,70.544 R224.1@59.967,71.822 60.696,71.822 60.893,72.018 62.597,72.018 63.893,70.722 63.893,62.902 62.507,61.516 62.507,58.058 63.503,57.063 63.503,57.016 63.731,56.787 63.778,56.787 64.069,56.496 65.403,56.496 IC6.AE1@66.715,55.184
QSPI_CFG_MISO_IO1: IC6.AD2 IC14.2 IC15.9 | length 61.3
  Top Layer w0.127: IC15.9@25.166,47.176 26.475,47.176 28.575,49.276 32.004,49.276 32.639,48.641 36.195,48.641 37.211,49.657 42.545,49.657 43.204,48.998 46.754,48.998 v1(56.884,59.128) ; IC14.2@59.967,64.844 59.967,63.883 60.198,63.652 60.198,62.738 60.348,62.588 60.348,57.438 60.927,56.858 61.31,56.858 61.906,56.261 v1(61.906,56.191) ; v1(63.893,57.177) 64.32,56.75 65.7,56.75 67.115,55.335 67.115,54.784 IC6.AD2@67.515,54.384
  Int2 (Sign) w0.127: v1(56.884,59.128) 56.893,59.118 57.274,59.118 57.381,59.225 58.943,59.225 61.906,56.261 v1(61.906,56.191)
  Bottom Layer w0.127: v1(61.906,56.191) 62.892,57.177 v1(63.893,57.177)
QSPI_CFG_MOSI_IO0: IC6.AE2 IC14.5 IC15.3 | length 67.9
  Top Layer w0.127: IC15.3@30.966,45.226 34.177,45.226 37.211,48.26 46.99,48.26 57.785,59.055 57.785,69.047 58.461,69.723 61.722,69.723 62.082,70.083 62.346,70.083 62.507,70.244 IC14.5@62.507,70.266 ; IC14.5@62.507,70.544 IC14.5@62.507,70.266 ; IC6.AE2@66.715,54.384 64.903,56.196 63.363,56.196 61.939,57.62 61.939,62.32 63.246,63.627 63.246,69.977 63.119,70.104 62.669,70.104 IC14.5@62.507,70.266
QSPI_CFG_SCK: IC6.AE3 IC14.6 IC15.2 R226.1 | length 60.3
  Top Layer w0.127: IC15.2@30.966,44.576 32.527,44.576 R226.1@32.549,44.554 32.549,44.534 33.058,44.025 34.05,44.025 36.475,46.45 37.159,46.45 38.715,48.006 47.117,48.006 58.03,58.919 58.03,58.963 58.258,59.191 58.302,59.191 59.586,60.475 ; v1(59.586,61.239) 59.586,60.475 ; IC14.6@61.237,70.544 61.214,70.567 61.214,71.405 61.363,71.554 v1(61.363,71.628) ; IC6.AE3@66.715,53.584 66.349,53.95 65.586,53.95 64.107,55.429 62.125,55.429 61.762,55.792 61.753,55.792 61.39,56.155 61.39,56.162 60.948,56.604 60.822,56.604 59.586,57.84 59.586,60.475
  Int2 (Sign) w0.127: v1(59.586,61.239) 61.363,63.016 v1(61.363,71.628)
QSPI_CLK: IC6.E11 R128.1 | length 92.6
  Top Layer w0.127: R128.1@50.82,65.925 51.314,65.925 51.464,65.775 v1(51.525,65.775) ; v1(82.3,47.606) IC6.E11@82.691,47.215
  Layer 1 w0.127: v1(51.525,65.775) 50.675,66.625 50.675,69.625 51.275,70.225 52.125,70.225 54.7,72.8 54.7,75.45 58.175,78.925 60.775,78.925 67.475,85.625 71.925,85.625 72.425,85.125 72.425,84.375 72.134,84.084 72.134,83.648 64.775,76.289 64.775,57.566 64.792,57.55 64.792,56.805 64.775,56.789 64.775,50.972 65.353,50.394 69.677,50.394 69.733,50.45 79.201,50.45 79.505,50.146 79.505,49.895 79.524,49.876 79.524,49.822 79.772,49.575 80.198,49.575 80.298,49.675 80.867,49.675 81.225,49.317 81.225,48.681 v1(82.3,47.606)
QSPI_IO0: IC6.AB24 R186.2 | length 71
  Top Layer w0.127: v1(68.715,36.384) IC6.AB24@69.115,36.784
  Bottom Layer w0.127: R186.2@36.825,75.595 36.825,78.65 40.45,82.275 41.8,82.275 45.2,78.875 45.2,71.925 46.925,70.2 46.925,69.823 51.45,65.298 51.45,62.5 54.062,59.888 54.062,59.138 54.587,58.613 54.587,56.738 56.825,54.5 56.825,53.4 58.825,51.4 58.825,49.55 60.85,47.525 60.85,38.225 63.082,35.993 68.324,35.993 v1(68.715,36.384)
QSPI_IO1: IC6.AA24 R187.2 | length 74.4
  Top Layer w0.127: v1(69.515,36.384) IC6.AA24@69.915,36.784
  Bottom Layer w0.127: R187.2@35.875,75.595 35.875,79.6 39.4,83.125 42.1,83.125 46.5,78.725 46.5,76.175 45.9,75.575 45.9,72.725 49.85,68.775 49.85,67.8 50.974,66.676 51.176,66.676 52.75,65.102 52.75,62.525 54.6,60.675 54.6,59.7 61.675,52.625 61.675,38.325 63.225,36.775 69.124,36.775 v1(69.515,36.384)
QSPI_IO2: IC6.AA23 R188.2 | length 76
  Top Layer w0.127: v1(69.515,37.184) IC6.AA23@69.915,37.584
  Bottom Layer w0.127: R188.2@34.95,75.595 34.95,77.65 34.5,78.1 34.5,79.7 38.825,84.025 42.125,84.025 47.175,78.975 47.175,72.63 50.664,69.142 50.664,68.291 53.527,65.427 53.527,63.098 55.125,61.5 55.125,60.2 60.775,54.55 61.25,54.55 62.475,53.325 62.475,38.625 63.506,37.594 66.477,37.594 66.483,37.6 66.9,37.6 66.913,37.587 68.864,37.587 68.952,37.499 69.199,37.499 v1(69.515,37.184)
QSPI_IO3: IC6.AA22 R189.2 | length 79.3
  Top Layer w0.127: v1(69.515,37.984) IC6.AA22@69.915,38.384
  Bottom Layer w0.127: R189.2@33.15,75.695 33.15,80.05 38.125,85.025 44.2,85.025 44.9,84.325 44.9,83.225 48.05,80.075 48.05,73.375 51.46,69.965 51.959,69.965 53.05,68.875 53.05,67.852 54.325,66.577 54.325,63.275 55.575,62.025 55.575,60.989 57.274,59.29 57.274,59.126 62.765,53.635 62.87,53.635 62.876,53.641 63.324,53.641 63.725,53.239 63.725,38.449 63.799,38.375 69.124,38.375 v1(69.515,37.984)
QSPI_NCS: IC6.AF25 IC9.112 | length 51.8
  Top Layer w0.127: IC9.112@30.435,53.521 30.458,53.499 30.458,52.346 v1(30.48,52.324) ; v1(65.531,35.6) IC6.AF25@65.915,35.984
  Int2 (Sign) w0.127: v1(30.48,52.324) 31.781,53.625 43.175,53.625 43.544,53.256 48.719,53.256 49.05,52.925 55.3,52.925 v1(55.875,52.35)
  Bottom Layer w0.127: v1(55.875,52.35) 57.975,50.25 57.975,39.35 59.784,37.541 59.784,36.936 61.471,35.25 65.181,35.25 v1(65.531,35.6)
R\E\_DE8A: IC7A.1 IC7A.40 IC8A.15 | length 27.7
  Top Layer w0.127: IC8A.15@109.675,6.106 109.675,6.606 109.909,6.841 109.909,6.91 110.021,7.022 110.629,7.022 110.74,6.91 110.74,6.263 110.826,6.177 110.998,6.177 v1(111.05,6.125) ; IC7A.40@129.825,5.356 129.825,6.034 v1(129.911,6.12) 129.997,6.206 133.785,6.206 133.935,6.056 IC7A.1@134.525,6.056
  Bottom Layer w0.127: v1(111.05,6.125) 111.405,6.48 113.419,6.48 113.967,5.931 117.431,5.931 117.676,6.176 123.817,6.176 123.883,6.11 127.245,6.11 127.256,6.12 v1(129.911,6.12)
R\E\_DE8B: IC7B.1 IC7B.40 IC8B.15 | length 28
  Top Layer w0.127: IC8B.15@109.675,17.606 v1(109.675,18.935) ; IC7B.40@129.825,16.856 129.825,17.534 v1(129.911,17.62) 129.997,17.706 133.785,17.706 133.935,17.556 IC7B.1@134.525,17.556
  Bottom Layer w0.127: v1(109.675,18.935) 111.704,18.935 111.852,18.787 113.764,18.787 114.3,18.25 122.175,18.25 123.025,17.4 124.301,17.4 124.598,17.697 124.622,17.697 124.625,17.7 125.8,17.7 125.978,17.878 129.654,17.878 v1(129.911,17.62)
R\E\_DE8C: IC7C.1 IC7C.40 IC8C.15 | length 28.9
  Top Layer w0.127: IC8C.15@109.544,54.146 v1(109.544,55.475) ; IC7C.40@129.694,53.396 129.694,54.074 v1(129.78,54.16) 129.866,54.246 133.654,54.246 133.804,54.096 IC7C.1@134.394,54.096
  Int2 (Sign) w0.127: v1(109.544,55.475) 109.55,55.469 109.992,55.469 109.998,55.475 111.286,55.475 111.757,55.945 113.161,55.945 113.167,55.939 113.606,55.939 116.445,53.1 128.72,53.1 v1(129.78,54.16)